# Altium PCB gecko3.PcbDoc (part 7 of 8)
Units mm, origin at the board's own origin, x right, y up, seen from the top; angles counter-clockwise.
Board outline 85.5 x 54.02 mm, 10 copper layers (Top Layer, MidLayer1, 1.2 & 2.5V Plane, GND Plane1, DDR layer 1, 3.3V Plane, DDR layer 2, GND Plane2, MidLayer2, Bottom Layer), stack 1.39 mm thick; 295 components, 567 nets, 2310 pads, 1568 vias.
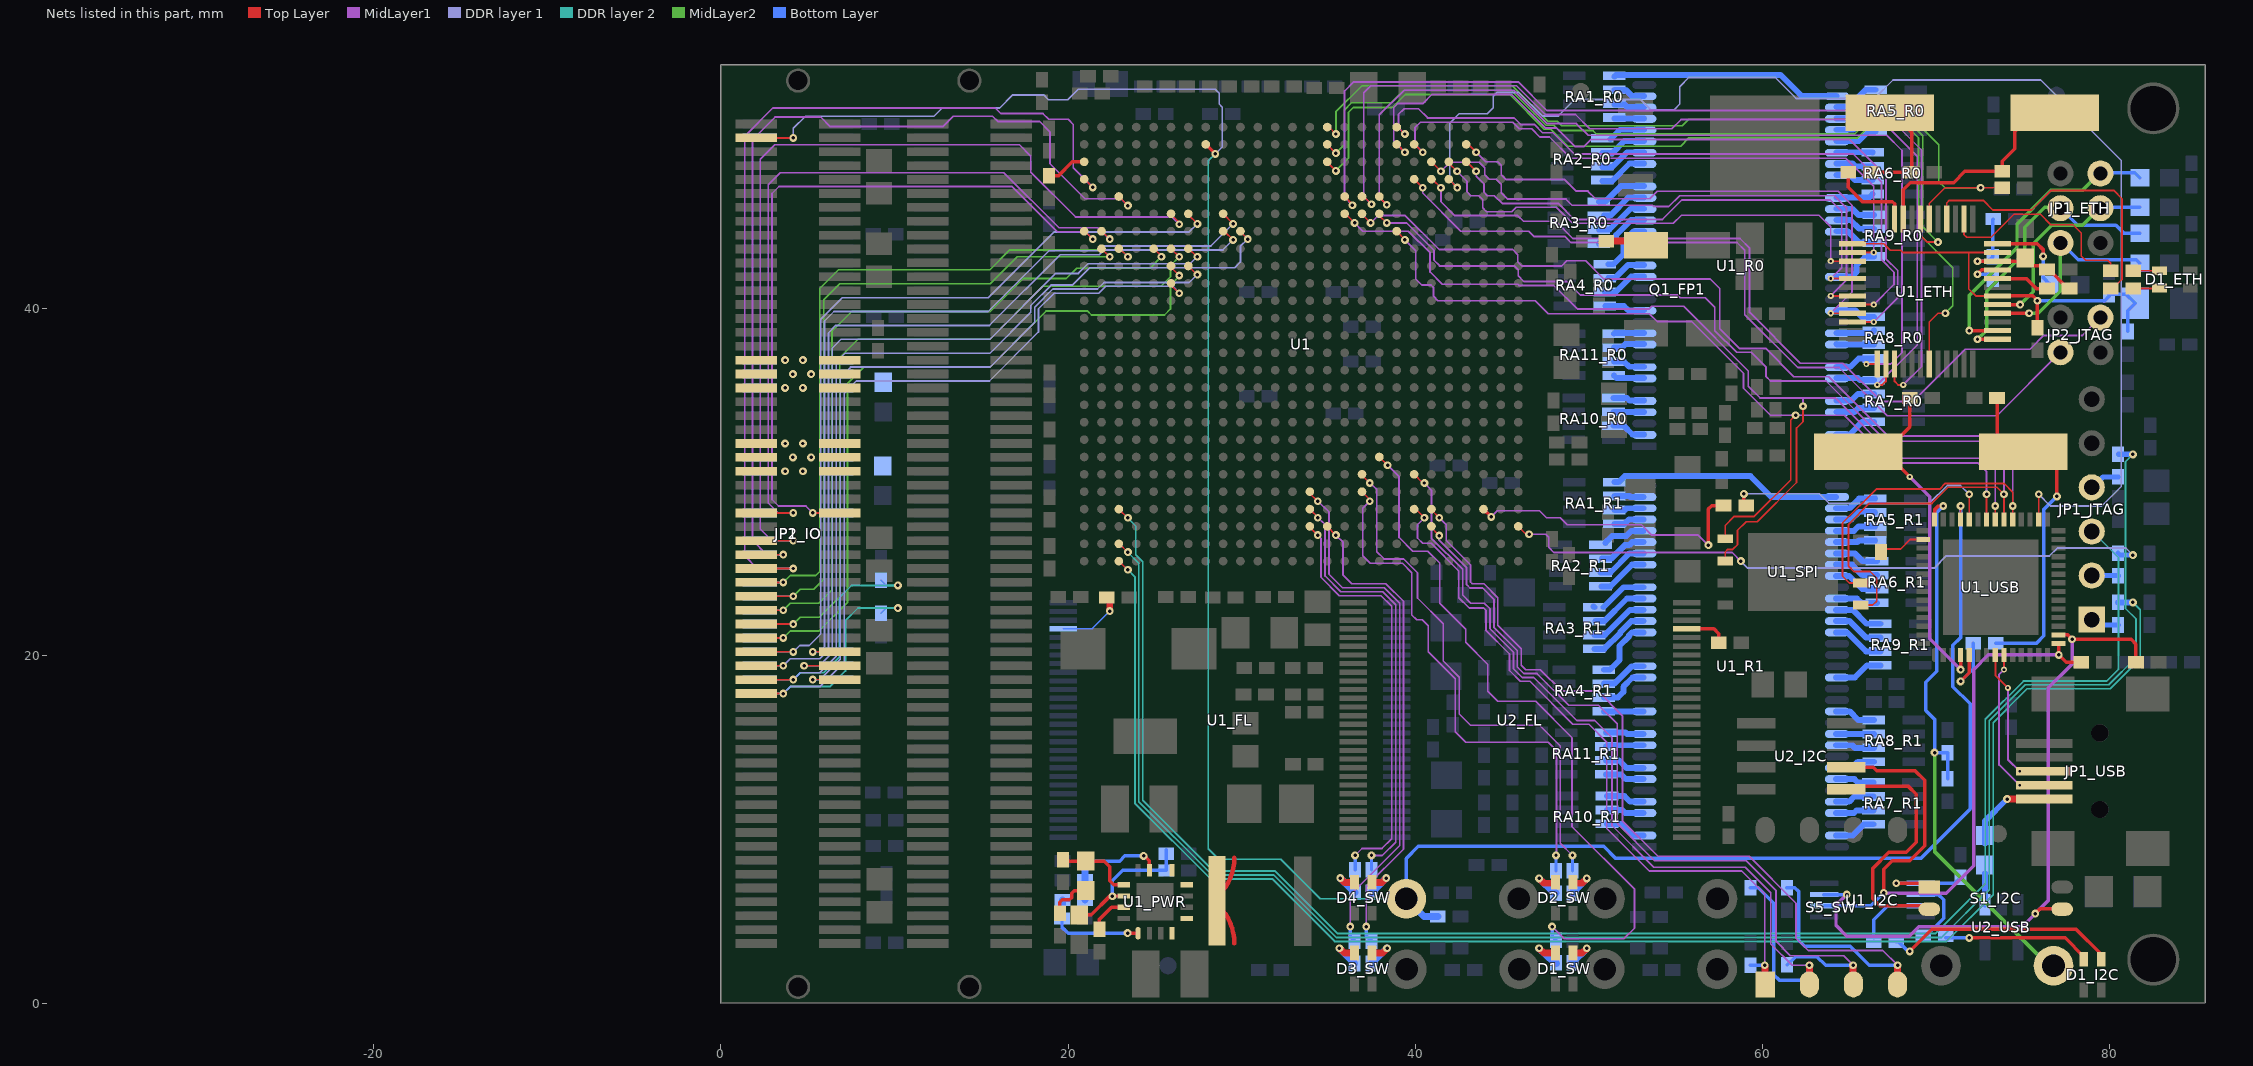
[diagram p15: the nets of this part, all layers, seen from the top]

## Via types
v1: diameter 0.45, hole 0.2, Top Layer to Bottom Layer, tented both sides, 1470 vias
v2: diameter 0.45, hole 0.2, Top Layer to Bottom Layer, tented bottom, 62 vias
v3: diameter 0.35, hole 0.15, Top Layer to MidLayer1, tented both sides, 26 vias
v4: diameter 0.45, hole 0.2, MidLayer2 to Bottom Layer, tented both sides, 10 vias

## Nets (pads, with @x,y where several pads share a name; then routed paths per layer and width w, separated by ;. In a path a pad name is that pad's centre, name@x,y a point inside that pad or via, vN(x,y) a via of type N, cw(c..) or ccw(c..) an arc to the next point about the centre after c; other vN are vias at no path point) (continued)
LED1: R2_SW.2 U1.G9 | length 41.2
  Top Layer w0.1: U1.G9@37.927,31.449 v1(38.4,30.975)
  MidLayer1 w0.1: v1(38.4,30.975) 39.062,30.312 39.062,26.812 39.85,26.025 40.72,26.025 41.4,25.345 41.4,23.03 42.9,21.53 42.9,20.775 44.175,19.5 44.175,17.95 44.75,17.375 46.925,17.375 49.025,15.275 49.025,10.155 52.625,6.555 52.625,4.325 52,3.7 48.575,3.7 v1(47.875,4.4)
  Bottom Layer w0.2: v1(47.875,4.4) 47.875,3.85 R2_SW.2@48.1,3.625
LED2: R3_SW.2 U1.F10 | length 30.8
  Top Layer w0.1: U1.F10@36.927,30.449 36.927,30.398 v1(37.375,29.95)
  MidLayer1 w0.1: v1(37.375,29.95) 37.775,29.6 37.775,26 38.2,25.575 39.325,25.575 40.125,24.775 40.125,23.325 41.6,21.85 41.6,19.7 42.527,18.773 42.527,16.648 43.175,16 47.15,16 48.35,14.8 48.35,9.2 v1(49.05,8.5)
  Bottom Layer w0.1: v1@49.05,8.475 v1(49.05,8.5)
  Bottom Layer w0.2: R3_SW.2@49.05,7.625 v1@49.05,8.475
LED3: R4_SW.2 U1.E10 | length 30.9
  Top Layer w0.1: U1.E10@36.927,29.449 37.375,29.001 v1(37.375,28.9)
  MidLayer1 w0.1: v1(37.375,28.9) 36.975,28.5 36.975,25.75 37.4,25.325 39.256,25.325 39.8,24.782 39.8,22.35 40.075,22.075 40.4,22.075 40.75,21.725 40.75,20.225 42.3,18.675 42.3,15.625 42.9,15.025 47.65,15.025 48.125,14.55 48.125,8.525 v1(48.1,8.5)
  Bottom Layer w0.2: R4_SW.2@48.1,7.625 v1(48.1,8.5)
LED4: R5_SW.2 U1.C12 | length 27.9
  Top Layer w0.1: U1.C12@34.927,27.449 v1(35.425,26.95)
  MidLayer1 w0.1: v1(35.425,26.95) 35.839,26.536 35.839,24.635 36.329,24.145 38.305,24.145 39.323,23.127 39.323,8.873 37.175,6.725 v1(37.175,4.4)
  Bottom Layer w0.2: v1(37.175,4.4) 37.175,3.875 R5_SW.2@37.475,3.575
LED5: R6_SW.2 U1.E13 | length 30.7
  Top Layer w0.1: U1.E13@33.927,29.449 33.927,29.348 v1(34.375,28.9)
  MidLayer1 w0.1: v1(34.375,28.9) 35.025,28.3 35.025,24.7 35.806,23.919 38.211,23.919 39.096,23.034 39.096,9.071 36.25,6.225 v1(36.25,4.4)
  Bottom Layer w0.2: v1(36.25,4.4) 36.25,3.825 R6_SW.2@36.5,3.575
LED6: R7_SW.2 U1.D13 | length 25.2
  Top Layer w0.1: U1.D13@33.927,28.448 v1@34.425,27.95
  MidLayer1 w0.1: v1(34.375,27.95) 34.8,27.575 34.8,24.6 35.711,23.689 38.116,23.689 38.867,22.938 38.867,9.267 38.1,8.5 v1(37.475,8.5)
  Bottom Layer w0.2: R7_SW.2@37.475,7.675 v1(37.475,8.5)
LED7: R8_SW.2 U1.C13 | length 24.7
  Top Layer w0.1: U1.C13@33.927,27.449 33.927,27.398 v1(34.375,26.95)
  MidLayer1 w0.1: v1(34.375,26.95) 34.562,26.763 34.562,24.518 35.617,23.463 38.022,23.463 38.641,22.845 38.641,9.466 38.075,8.9 36.925,8.9 v1(36.525,8.5)
  Bottom Layer w0.2: R8_SW.2@36.525,7.675 v1(36.525,8.5)
LINESENSORCLK: JP1_IO.82 JP2_IO.82 U1.V20 | length 45.5
  Top Layer w0.1: v1@5.275,18.625 v1(5.3,18.625) 6.825,18.65 JP2_IO.82@6.85,18.625 ; U1.V20@26.927,42.448 v1@27.425,41.95
  DDR layer 1 w0.1: v1(5.3,18.625) 5.7,18.625 6.877,19.802 6.877,36.027 7.475,36.625 15.5,36.625 18.075,39.2 18.075,40.075 19.122,41.122 21.697,41.122 22.075,41.5 26.975,41.5 v1@27.425,41.95
  Bottom Layer w0.1: v1(5.3,18.625) 6.625,18.65 JP1_IO.82@6.65,18.625
  other v1: 27.45,41.95
LINESENSORIN1: JP1_IO.77 JP2_IO.77 U1.AA20 | length 48.9
  Top Layer w0.1: JP2_IO.77@2.05,20.225 v1(4.175,20.225) ; U1.AA20@26.927,45.449 26.927,45.398 v1(27.45,44.875)
  DDR layer 1 w0.1: v1(4.175,20.225) 4.541,20.591 5.091,20.591 5.75,21.25 5.75,39.375 7,40.625 15.4,40.625 19.175,44.4 26.95,44.4 v1(27.45,44.875)
  Bottom Layer w0.1: JP1_IO.77@2.25,20.225 v1(4.175,20.225)
LINESENSORIN2: JP1_IO.79 JP2_IO.79 U1.Y18 | length 50.4
  Top Layer w0.1: JP2_IO.79@2.05,19.425 v1(3.6,19.425) ; U1.Y18@28.927,44.449 29.001,44.449 v1(29.5,43.95)
  DDR layer 1 w0.1: v1(3.6,19.425) 4,19.825 5.7,19.825 6.2,20.325 6.2,38.6 6.625,39.025 15.475,39.025 19.55,43.1 21.8,43.1 22.075,43.375 28.925,43.375 v1(29.5,43.95)
  Bottom Layer w0.1: JP1_IO.79@2.25,19.425 v1(3.6,19.425)
LINESENSOROUT1: JP1_IO.78 JP2_IO.78 U1.AA18 | length 49.2
  Top Layer w0.1: v1(5.3,20.225) JP2_IO.78@6.85,20.225 ; U1.AA18@28.852,45.302 28.852,45.327 U1.AA18@28.927,45.327 ; U1.AA18@28.927,45.448 v1(29.5,44.875)
  DDR layer 1 w0.1: v1(5.3,20.225) 5.675,20.225 5.975,20.525 5.975,39.282 6.518,39.825 15.4,39.825 18.9,43.325 21.7,43.325 21.975,43.6 22.275,43.6 27.55,43.6 28.225,43.6 v1(29.5,44.875)
  Bottom Layer w0.1: v1(5.3,20.225) JP1_IO.78@6.65,20.225
LINESENSOROUT2: JP1_IO.80 JP2_IO.80 U1.W20 | length 47.3
  Top Layer w0.1: v1(4.8,19.425) JP2_IO.80@6.85,19.425 JP2_IO.80@6.825,19.45 ; U1.W20@26.927,43.449 26.951,43.449 v1@27.425,42.975
  DDR layer 1 w0.1: v1(4.8,19.425) 5.675,19.425 6.425,20.175 6.425,37.725 6.925,38.225 15.5,38.225 19.296,42.021 20.596,42.021 21.15,42.575 27.025,42.575 v1@27.425,42.975
  Bottom Layer w0.1: v1(4.8,19.425) JP1_IO.80@6.65,19.425 JP1_IO.80@6.625,19.45
  other v1: 27.45,42.975
"LOW BATTERY": JP1_IO.57 JP2_IO.57 U1.Y25 | length 46.3
  Top Layer w0.1: JP2_IO.57@2.05,28.225 v1(4.175,28.225) ; U1.Y25@21.927,44.449 21.951,44.449 v1(22.4,44)
  MidLayer1 w0.1: v1(4.175,28.225) 3.3,28.225 2.725,28.8 2.725,47.125 3.425,47.825 16.3,47.825 19.475,44.65 21.705,44.65 22.355,44 v1(22.4,44)
  Bottom Layer w0.1: JP1_IO.57@2.25,28.225 v1(4.175,28.225)
MDC: U1.AE12 U1_ETH.31 | length 47.3
  Top Layer w0.1: U1.AE12@34.927,49.449 v1(35.425,48.95) ; U1_ETH.31@69.1,45.15 69.1,44.2 69.475,43.825 v1(70.1,43.825)
  MidLayer2 w0.1: v1(35.425,48.95) 35.9,49.425 35.9,51.425 36.325,51.85 38.6,51.85 39.325,52.575 45.505,52.575 47.527,50.553 47.972,50.553 48.275,50.25 50.225,50.25 50.425,50.05 65.3,50.05 65.875,50.625 68.55,50.625 69.225,49.95 69.225,44.7 v1(70.1,43.825)
MDIO: R15_ETH.2 U1.AF12 U1_ETH.30 | length 49.1
  Top Layer w0.1: U1.AF12@34.927,50.449 35.026,50.449 v1(35.425,50.05) ; U1_ETH.30@69.6,45.15 69.6,46.05 70.5,46.95 R15_ETH.2@73.8,46.95
  MidLayer2 w0.1: v1(35.425,50.05) 35.425,51.325 36.925,52.825 45.58,52.825 47.627,50.778 48.172,50.778 48.425,50.525 55.375,50.525 55.75,50.9 68.675,50.9 70.15,49.425 70.15,47.3 70.5,46.95 v1(72.55,46.95)
MISO: U1.AA11 U1_SPI.2 U1_USB.35 | length 59.6
  Top Layer w0.1: U1.AA11@35.927,45.449 35.976,45.449 v1(36.5,44.925) ; U1_SPI.2@57.85,25.46 57.85,25.975 58,26.125 58.275,26.125 58.55,26.4 58.55,27.225 59.05,27.725 59.7,27.725 61.95,29.975 61.95,33.112 62.325,33.487 v1(62.325,34.375) ; U1_USB.35@73.4,27.85 v1(73.4,28.625)
  MidLayer1 w0.1: v1(36.5,44.925) 36.975,44.45 39.6,44.45 40.85,43.2 40.85,42.1 41.55,41.4 45.9,41.4 45.975,41.325 47.975,41.325 49.325,39.975 53.475,39.975 53.625,40.125 55.45,40.125 59.175,36.4 59.175,35.525 59.85,34.85 64.175,34.85 67.65,31.375 72.825,31.375 73.4,30.8 v1(73.4,28.625) ; v1(62.325,34.375) 62.325,34.85
MOSI: U1.AA9 U1_SPI.5 U1_USB.34 | length 63.5
  Top Layer w0.1: U1.AA9@37.927,45.449 37.927,45.348 v1(38.35,44.925) ; U1_SPI.5@65.65,22.92 66.345,22.92 66.575,23.15 66.575,24.475 66.2,24.85 65.25,24.85 64.95,25.15 64.95,27.575 66.15,28.775 69.75,28.775 70.675,29.7 73.5,29.7 v1(73.9,29.3) U1_USB.34@73.9,27.85
  MidLayer1 w0.1: v1(38.35,44.925) 39.5,44.925 41.075,43.35 41.075,42.775 41.397,42.453 45.697,42.453 45.925,42.225 45.925,41.875 46.247,41.553 48.722,41.553 49.5,40.775 55.1,40.775 55.25,40.625 56.7,40.625 57.25,40.075 57.25,38.725 58.5,37.475 59.35,37.475 60.2,36.625 60.2,36.075 60.45,35.825 63.65,35.825 67.125,32.35 72.625,32.35 73.9,31.075 v1(73.9,29.3)
NetC1_PWR_2: C1_PWR.2 R1_PWR.1 U1_PWR.1 | length 6.1
  Top Layer w0.2: v1(23.425,4.025) 24.025,4.025 U1_PWR.1@24.031,4.019
  Bottom Layer w0.2: C1_PWR.2@19.65,4.875 19.65,4.375 20,4.025 v1(23.425,4.025)
  Bottom Layer w0.4: C1_PWR.2@19.675,4.9 R1_PWR.1@19.675,5.925
NetC2_PWR_2: C2_PWR.2 R3_PWR.1 U1_PWR.13 | length 4.6
  Top Layer w0.2: C2_PWR.2@19.7,8.25 19.775,8.175 22.075,8.175 22.397,7.853 22.397,7.053 22.636,6.814 U1_PWR.13@23.211,6.814
NetC2_USB_2: C2_USB.2 Q1_USB.1 R4_USB.2 | length 20.4
  Top Layer w0.2: C2_USB.2@73.5,34.85 73.5,32.25 74,31.75 76.65,31.75 76.95,31.45 v1(76.95,29.175) ; Q1_USB.1@76.225,31.75 Q1_USB.1@76.525,31.45
  Bottom Layer w0.2: R4_USB.2@73.425,20.725 75.775,20.725 76.2,21.15 76.2,28.425 v1(76.95,29.175)
NetC3_PWR_2: C3_PWR.2 R3_PWR.2 | length 2.6
  Top Layer w0.2: C3_PWR.2@19.525,5.175 19.525,5.8 19.675,5.95 20.075,5.95 20.2,6.075 20.2,6.325 20.35,6.475 R3_PWR.2@21.025,6.475
NetC3_USB_2: C3_USB.2 Q1_USB.2 U1_USB.4 | length 20.2
  Top Layer w0.2: Q1_USB.2@65.65,31.75 Q1_USB.2@67.025,31.75 ; v3(68.475,30.3) 67.1,31.675 67.1,31.8 68.475,33.175 C3_USB.2@68.475,34.85 ; v1(71.4,19.2) U1_USB.4@71.4,20.05
  MidLayer1 w0.2: v3(68.475,30.3) 69.625,29.15 69.625,20.975 v1(71.4,19.2)
NetC4_ETH_2: C4_ETH.2 C5_ETH.2 L1_ETH.2 R4_ETH.2 R5_ETH.2 U1_ETH.22 | length 9.3
  Top Layer w0.2: v1@72.325,42.725 74.95,42.725 L1_ETH.2@75.125,42.9 75.55,42.475 76.15,42.475 C4_ETH.2@76.375,42.25 76.475,42.25 77.575,41.15 R5_ETH.2@77.675,41.15
  Bottom Layer w0.2: v1(72.375,42.725) 73,42.725 R4_ETH.2@73.25,42.975 73.25,45.125 C5_ETH.2@73.275,45.15
NetC4_USB_2: C4_USB.2 R5_USB.1 S1_USB.2 U1_USB.42 | length 33.6
  Top Layer w0.2: U1_USB.42@69.9,27.85 69.9,28.4 70.125,28.625 v1(70.4,28.625)
  MidLayer2 w0.2: v1(69.9,14.425) 69.9,8.725 S1_USB.2@76.75,1.875
  Bottom Layer w0.2: v1(70.4,28.625) 70.025,28.25 70.025,19.1 69.4,18.475 69.4,16.85 69.9,16.35 v1(69.9,14.425) C4_USB.2@70.65,14.425 R5_USB.1@70.65,12.925
NetC6_ETH_2: C6_ETH.2 C7_ETH.2 C8_ETH.2 C13_ETH.2 U1_ETH.18 U1_ETH.23 U1_ETH.37 | length 24.3
  Top Layer w0.1: U1_ETH.37@65.175,43.725 66.975,43.725 67.35,43.35 67.95,43.35 68.075,43.225 U1_ETH.23@73.525,43.225 ; 71.875,43.225 71.875,41.125 72.275,40.725 U1_ETH.18@73.525,40.725
  Top Layer w0.2: U1_ETH.18@73.525,40.725 75.55,40.725 v1(75.825,40.45) C8_ETH.2@75.825,38.9
  Bottom Layer w0.2: v1(75.825,40.45) 79.7,40.45 79.95,40.7 79.95,40.825 80.925,40.825 C13_ETH.2@81.45,40.3 81.025,39.875 C7_ETH.2@81.025,38.675
NetC6_PWR_2: C6_PWR.2 R4_PWR.2 R5_PWR.2 U1_PWR.14 | length 8.4
  Top Layer w0.2: R4_PWR.2@20.65,5.075 21.325,5.075 22.414,6.164 U1_PWR.14@23.211,6.164
  Bottom Layer w0.2: v1(22.55,6.15) 22.55,7.05 23.15,7.65 25.65,7.65 R5_PWR.2@25.65,8.825
NetC9_ETH_2: C9_ETH.2 Q1_ETH.1 U1_ETH.33 | length 13.3
  Top Layer w0.2: U1_ETH.33@68.1,45.15 68.1,46.85 68.5,47.25 71,47.25 71.65,47.9 C9_ETH.2@73.8,47.9 ; C9_ETH.2@73.8,47.85 73.8,48.475 74.525,49.2 74.525,50.175 75.35,51 Q1_ETH.1@76.975,51
NetC10_ETH_2: C10_ETH.2 Q1_ETH.2 R1_ETH.1 | length 6.1
  Top Layer w0.2: R1_ETH.1@66.225,47.85 C10_ETH.2@68.575,47.85 68.575,50.15 67.725,51 Q1_ETH.2@67.475,51
NetC22_PWR_1: C22_PWR.1 R1_PWR.2 R8_PWR.2 U1_PWR.11 | length 6.7
  Top Layer w0.2: v1(24.35,8.475) 24.4,8.475 24.681,8.194 U1_PWR.11@24.681,7.659
  Bottom Layer w0.2: R8_PWR.2@20.975,8.175 22.975,8.175 23.275,8.475 v1(24.35,8.475)
  Bottom Layer w0.4: R1_PWR.2@20.975,5.925 C22_PWR.1@20.975,7.075 R8_PWR.2@20.975,8.175
NetD1_ETH_2: D1_ETH.2 R11_ETH.1 | length 1.5
  Top Layer w0.1: R11_ETH.1@81.35,42.175 D1_ETH.2@82.85,42.175
NetD1_ETH_4: D1_ETH.4 R10_ETH.1 | length 1.5
  Top Layer w0.1: R10_ETH.1@81.542,41.159 R10_ETH.1@81.551,41.15
  Top Layer w0.101: R10_ETH.1@81.35,41.15 82.825,41.15 D1_ETH.4@82.85,41.175
NetD1_I2C_1: D1_I2C.1 R2_I2C.1 | length 8.5
  Top Layer w0.2: v1(71.9,3.75) 77.425,3.75 78.5,2.675 D1_I2C.1@78.5,2.525
  Bottom Layer w0.2: R2_I2C.1@70.55,3.75 v1(71.9,3.75)
NetD1_I2C_3: D1_I2C.3 R1_I2C.1 | length 13.4
  Top Layer w0.2: v1(68.475,2.975) 69.75,4.25 78.05,4.25 79.5,2.8 D1_I2C.3@79.5,2.525
  Bottom Layer w0.2: R1_I2C.1@67.7,3.525 67.825,3.525 68.375,2.975 v1(68.475,2.975)
NetD1_SW_1: D1_SW.1 R2_SW.1 | length 2.4
  Top Layer w0.4: v1(47.125,3.15) 47.4,2.875 D1_SW.1@48.075,2.875
  Bottom Layer w0.4: v1(47.125,3.15) 47.975,2.325 R2_SW.1@48.1,2.325 ; R2_SW.1@48.075,2.275 R2_SW.1@48.125,2.275
NetD1_SW_3: D1_SW.3 R1_SW.1 | length 2.2
  Top Layer w0.4: D1_SW.3@49.075,2.875 49.6,2.875 v1(49.875,3.15)
  Bottom Layer w0.4: R1_SW.1@49,2.275 R1_SW.1@49.025,2.275 ; R1_SW.1@49.05,2.325 v1(49.875,3.15) ; R1_SW.1@49.125,2.275 R1_SW.1@49.175,2.275
NetD2_SW_1: D2_SW.1 R4_SW.1 | length 2.4
  Top Layer w0.4: v1(47.125,7.175) 47.4,6.9 D2_SW.1@48.075,6.9
  Bottom Layer w0.4: v1(47.125,7.175) 47.975,6.325 R4_SW.1@48.1,6.325
NetD2_SW_3: D2_SW.3 R3_SW.1 | length 2.1
  Top Layer w0.4: D2_SW.3@49.075,6.9 49.6,6.9 v1(49.875,7.175)
  Bottom Layer w0.4: R3_SW.1@49.05,6.325 49.05,6.35 v1(49.875,7.175)
NetD3_SW_1: D3_SW.1 R6_SW.1 | length 2.2
  Top Layer w0.4: v1(35.625,3.15) 35.925,2.875 D3_SW.1@36.5,2.875
  Bottom Layer w0.4: v1(35.625,3.15) 35.7,3.075 R6_SW.1@36.5,2.275
NetD3_SW_3: D3_SW.3 R5_SW.1 | length 2.3
  Top Layer w0.4: D3_SW.3@37.5,2.875 38.1,2.875 v1(38.375,3.15)
  Bottom Layer w0.4: R5_SW.1@37.475,2.275 38.375,3.175 v1(38.375,3.15)
NetD4_SW_1: D4_SW.1 R8_SW.1 | length 2.1
  Top Layer w0.4: v1(35.675,7.2) 35.925,6.95 D4_SW.1@36.5,6.95
  Bottom Layer w0.4: v1(35.675,7.2) 36.5,6.375 R8_SW.1@36.525,6.375
NetD4_SW_3: D4_SW.3 R7_SW.1 | length 2.1
  Top Layer w0.4: D4_SW.3@37.5,6.95 38.075,6.95 v1(38.325,7.2)
  Bottom Layer w0.4: R7_SW.1@37.475,6.375 37.5,6.375 v1(38.325,7.2)
NetFB1_IO_2: FB1_IO.2 JP1_IO.35 JP1_IO.36 JP1_IO.37 JP1_IO.38 JP1_IO.39 JP1_IO.40 JP2_IO.35 JP2_IO.36 JP2_IO.37 JP2_IO.38 JP2_IO.39 JP2_IO.40
  other v1: 3.7,35.425 4.725,35.425 4.15,36.225 5.2,36.225 3.7,37.025 4.725,37.025
NetFB1_USB_1: FB1_USB.1 JP1_USB.Vbus | length 5.3
  Top Layer w0.4: v1(74.075,11.75) JP1_USB.Vbus@76.225,11.75
  Bottom Layer w0.34: FB1_USB.1@72.8,9.175 72.8,10.475 v1(74.075,11.75)
NetFB1_USB_2: FB1_USB.2 U2_USB.1 | length 1.8
  Bottom Layer w0.34: FB1_USB.2@72.8,7.475 72.8,5.663 U2_USB.1@72.804,5.659
NetFB2_IO_2: FB2_IO.2 JP1_IO.47 JP1_IO.48 JP1_IO.49 JP1_IO.50 JP1_IO.51 JP1_IO.52 JP2_IO.47 JP2_IO.48 JP2_IO.49 JP2_IO.50 JP2_IO.51 JP2_IO.52
  other v1: 3.7,30.625 4.725,30.625 4.15,31.425 5.2,31.425 3.7,32.225 4.725,32.225
NetJP1_JTAG_1: JP1_JTAG.1 R2_JTAG.2 | length 1.6
  Bottom Layer w0.3: JP1_JTAG.1@79,22.075 79.3,21.775 R2_JTAG.2@80.5,21.775
NetJP1_JTAG_2: JP1_JTAG.2 R3_JTAG.2 | length 1.6
  Bottom Layer w0.3: JP1_JTAG.2@78.955,24.615 80.485,24.615 R3_JTAG.2@80.5,24.6
NetJP1_JTAG_4: JP1_JTAG.4 R1_JTAG.2 | length 1.8
  Bottom Layer w0.3: JP1_JTAG.4@79,29.695 79.605,30.3 R1_JTAG.2@80.5,30.3
NetJP1_USB_D+: JP1_USB.D+ U1_USB.8 | length 7.3
  Top Layer w0.12: U1_USB.8@73.4,20.05 73.4,18.875 v3(74.125,18.15)
  MidLayer1 w0.12: v3(74.125,18.15) 74.125,14.025 v3(74.8,13.35)
NetJP1_USB_D-: JP1_USB.D- U1_USB.9 | length 8.1
  Top Layer w0.12: v3(73.9,19.2) 73.9,19.25 U1_USB.9@73.9,20.05
  MidLayer1 w0.12: v3(73.9,19.2) 73.625,18.925 73.625,13.725 v3(74.8,12.55)
NetL1_PWR_1: L1_PWR.1 U1_PWR.4 U1_PWR.5 U1_PWR.8 U1_PWR.9
NetQ1_FP1_3: Q1_FP1.3 R2_FP1.2 | length 2.4
  Top Layer w0.4: R2_FP1.2@51,43.875 52.425,43.875 52.575,43.725 53.217,43.725 Q1_FP1.3@53.292,43.65
NetR1_ETH_2: R1_ETH.2 U1_ETH.34 | length 4.9
  Top Layer w0.2: R1_ETH.2@64.925,47.9 64.925,46.975 65.75,46.15 67.475,46.15 67.6,46.025 U1_ETH.34@67.6,45.15
NetR1_I2C_2: R1_I2C.2 U1_I2C.3 | length 4.1
  Bottom Layer w0.2: R1_I2C.2@66.4,3.75 66.4,4.8 67.2,5.6 U1_I2C.3@69.075,5.6
NetR2_ETH_2: R2_ETH.2 U1_ETH.24 | length 5
  Top Layer w0.2: U1_ETH.24@73.525,43.725 75.825,43.725 76.15,43.4 v1(76.15,43)
  Bottom Layer w0.2: v1(76.15,43) 76.15,41.8 R2_ETH.2@76.575,41.375
NetR2_I2C_2: R2_I2C.2 U1_I2C.2 | length 4.2
  Bottom Layer w0.2: U1_I2C.2@69.1,6.25 70.125,6.25 70.425,5.95 70.425,4.875 69.3,3.75 R2_I2C.2@69.25,3.75
NetR2_PWR_1: R2_PWR.1 U1_PWR.15 | length 2.3
  Top Layer w0.2: R2_PWR.1@21.8,4.25 21.8,4.814 22.5,5.514 U1_PWR.15@23.211,5.514
NetR3_CNF_2: R3_CNF.2 U1.AD26 | length 2.8
  Top Layer w0.2: R3_CNF.2@18.65,47.65 R3_CNF.2@18.975,47.975 ; R3_CNF.2@18.9,47.65 19.45,47.65 20.249,48.449 U1.AD26@20.927,48.449
NetR3_FL_1: R3_FL.1 U1_FL.53 | length 3.9
  Top Layer w0.4: R3_FL.1@22.225,23.35 22.4,23.175 v1(22.4,22.575)
  Bottom Layer w0.1: U1_FL.53@19.725,21.55 21.375,21.55 v1(22.4,22.575)
NetR3_I2C_1: R3_I2C.1 S1_I2C.1 U1_I2C.1 | length 7.7
  Top Layer w0.2: v1(67.7,6.9) 69.375,6.9 S1_I2C.1@69.6,6.675
  Bottom Layer w0.2: v1(67.7,6.9) U1_I2C.1@69.1,6.9 68.151,6.9 71.05,6.9 R3_I2C.1@71.4,7.25
NetR4_CNF_2: R4_CNF.2 U1.D3 | length 17.1
  Top Layer w0.2: U1.D3@43.927,28.448 v1(44.375,28) ; v1(56.875,26.375) 56.875,28.45 57.075,28.65 R4_CNF.2@57.75,28.65
  MidLayer1 w0.1: v1(44.375,28) 44.725,28.35 47.15,28.35 47.55,27.95 48.35,27.95 48.75,27.55 53.025,27.55 53.625,26.95 56.3,26.95 v1(56.875,26.375)
NetR4_ETH_1: R4_ETH.1 U1_ETH.21 | length 2.2
  Top Layer w0.2: v1(72.375,41.975) 72.625,42.225 U1_ETH.21@73.525,42.225
  Bottom Layer w0.2: v1(72.375,41.975) 73.125,41.975 R4_ETH.1@73.25,41.85
NetR4_FL_1: R4_FL.1 U2_FL.53 | length 2.5
  Top Layer w0.2: U2_FL.53@55.625,21.55 57.2,21.55 57.475,21.275 R4_FL.1@57.475,20.75
NetR4_USB_1: R4_USB.1 U1_USB.5 | length 4.2
  Top Layer w0.2: v1(71.4,18.525) 71.9,19.025 U1_USB.5@71.9,20.05
  Bottom Layer w0.2: v1(71.4,18.525) 72.125,19.25 R4_USB.1@72.125,20.725
NetR5_ETH_1: R5_ETH.1 U1_ETH.20 | length 3.1
  Top Layer w0.2: U1_ETH.20@73.525,41.725 75.175,41.725 75.75,41.15 R5_ETH.1@76.375,41.15
NetR6_USB_1: R6_USB.1 U1_USB.44 | length 2.7
  Top Layer w0.1: R6_USB.1@66.825,25.975 67,26.15 67.95,26.15 68.5,26.7 U1_USB.44@69.25,26.7
NetR10_ETH_2: R10_ETH.2 U1_ETH.28 | length 17.5
  Top Layer w0.1: U1_ETH.28@70.6,45.15 70.6,46.075 70.75,46.225 72.7,46.225 73.25,45.675 75.5,45.675 76.625,46.8 80.225,46.8 80.7,46.325 80.7,41.675 80.175,41.15 R10_ETH.2@80.05,41.15
NetR11_ETH_2: R11_ETH.2 U1_ETH.26 | length 12.3
  Top Layer w0.1: U1_ETH.26@71.6,45.15 71.6,44.25 71.75,44.1 73.15,44.1 74.475,45.425 76,45.425 76.6,44.825 77.875,44.825 78.35,44.35 78.35,43.025 78.6,42.775 79.875,42.775 80.05,42.6 R11_ETH.2@80.05,42.175
NetRA1_R0_5: RA1_R0.5 U1_R0.35 | length 13.3
  Bottom Layer w0.34: RA1_R0.5@51.461,53.346 51.561,53.446 61.036,53.446 62.236,52.246 U1_R0.35@64.261,52.246
NetRA1_R0_6: RA1_R0.6 U1_R0.32 | length 2.4
  Bottom Layer w0.34: RA1_R0.6@51.461,52.546 RA1_R0.6@52.036,52.546 ; RA1_R0.6@51.461,52.596 52.111,52.596 52.461,52.246 U1_R0.32@53.161,52.246
NetRA1_R0_7: RA1_R0.7 U1_R0.31 | length 1.8
  Bottom Layer w0.34: RA1_R0.7@51.461,51.746 52.054,51.746 52.204,51.596 U1_R0.31@53.161,51.596
NetRA1_R0_8: RA1_R0.8 U1_R0.30 | length 1.7
  Bottom Layer w0.34: RA1_R0.8@51.461,50.946 U1_R0.30@53.161,50.946
NetRA1_R1_5: RA1_R1.5 U1_R1.35 | length 13.4
  Bottom Layer w0.34: RA1_R1.5@51.461,29.996 51.711,29.996 52.061,30.346 59.304,30.346 60.504,29.146 U1_R1.35@64.236,29.146
NetRA1_R1_6: RA1_R1.6 U1_R1.32 | length 1.7
  Bottom Layer w0.34: RA1_R1.6@51.461,29.196 52.336,29.196 52.386,29.146 U1_R1.32@53.136,29.146
NetRA1_R1_7: RA1_R1.7 U1_R1.31 | length 1.7
  Bottom Layer w0.34: RA1_R1.7@51.461,28.396 52.066,28.396 52.166,28.496 U1_R1.31@53.136,28.496
NetRA1_R1_8: RA1_R1.8 U1_R1.30 | length 1.8
  Bottom Layer w0.34: RA1_R1.8@51.461,27.596 52.048,27.596 52.299,27.846 U1_R1.30@53.136,27.846
NetRA2_R0_5: RA2_R0.5 U1_R0.29 | length 2.2
  Bottom Layer w0.34: RA2_R0.5@51.236,49.746 51.786,50.296 U1_R0.29@53.161,50.296
NetRA2_R0_6: RA2_R0.6 U1_R0.28 | length 2.7
  Bottom Layer w0.34: RA2_R0.6@50.761,48.946 51.336,48.946 52.036,49.646 U1_R0.28@53.161,49.646
NetRA2_R0_7: RA2_R0.7 U1_R0.27 | length 2.8
  Bottom Layer w0.34: RA2_R0.7@50.761,48.146 51.336,48.146 52.186,48.996 U1_R0.27@53.161,48.996
NetRA2_R0_8: RA2_R0.8 U1_R0.26 | length 2.8
  Bottom Layer w0.34: RA2_R0.8@50.761,47.346 51.336,47.346 52.336,48.346 U1_R0.26@53.161,48.346
NetRA2_R1_5: RA2_R1.5 U1_R1.29 | length 2.5
  Bottom Layer w0.34: RA2_R1.5@50.943,26.503 51.336,26.896 52.144,26.896 52.444,27.196 U1_R1.29@53.136,27.196
NetRA2_R1_6: RA2_R1.6 U1_R1.28 | length 2.8
  Bottom Layer w0.34: RA2_R1.6@50.738,25.596 51.286,25.596 52.061,26.371 52.312,26.371 52.487,26.546 U1_R1.28@53.136,26.546
NetRA2_R1_7: RA2_R1.7 U1_R1.27 | length 2.9
  Bottom Layer w0.34: RA2_R1.7@50.661,24.796 51.236,24.796 52.336,25.896 U1_R1.27@53.136,25.896
NetRA2_R1_8: RA2_R1.8 U1_R1.26 | length 2.9
  Bottom Layer w0.34: RA2_R1.8@50.711,23.996 51.236,23.996 52.475,25.235 52.475,25.246 U1_R1.26@53.136,25.246
NetRA3_R0_5: RA3_R0.5 U1_R0.24 | length 2.9
  Bottom Layer w0.34: RA3_R0.5@50.586,46.146 50.936,46.146 51.836,47.046 U1_R0.24@53.161,47.046
NetRA3_R0_6: RA3_R0.6 U1_R0.23 | length 2.7
  Bottom Layer w0.34: RA3_R0.6@50.861,45.346 51.217,45.346 52.267,46.396 U1_R0.23@53.161,46.396
NetRA3_R0_7: RA3_R0.7 U1_R0.22 | length 3.1
  Bottom Layer w0.34: RA3_R0.7@50.561,44.546 51.186,44.546 52.386,45.746 U1_R0.22@53.161,45.746
NetRA3_R0_8: RA3_R0.8 U1_R0.21 | length 3.2
  Bottom Layer w0.34: RA3_R0.8@50.561,43.746 51.186,43.746 51.561,44.121 51.561,44.228 52.429,45.096 U1_R0.21@53.161,45.096
NetRA3_R1_5: RA3_R1.5 U1_R1.24 | length 2.8
  Bottom Layer w0.34: RA3_R1.5@50.261,22.846 RA3_R1.5@50.311,22.796 ; RA3_R1.5@50.836,22.796 51.986,23.946 U1_R1.24@53.136,23.946
NetRA3_R1_6: RA3_R1.6 U1_R1.23 | length 3.3
  Bottom Layer w0.34: RA3_R1.6@50.386,21.996 50.886,21.996 52.186,23.296 U1_R1.23@53.136,23.296
NetRA3_R1_7: RA3_R1.7 U1_R1.22 | length 3.4
  Bottom Layer w0.34: RA3_R1.7@50.311,21.196 50.911,21.196 52.361,22.646 U1_R1.22@53.136,22.646
NetRA3_R1_8: RA3_R1.8 U1_R1.21 | length 3.5
  Bottom Layer w0.34: RA3_R1.8@50.311,20.396 50.886,20.396 51.823,21.333 51.823,21.383 52.436,21.996 U1_R1.21@53.136,21.996
NetRA4_R0_5: RA4_R0.5 U1_R0.20 | length 3.3
  Bottom Layer w0.34: RA4_R0.5@51.111,42.546 51.411,42.546 51.977,43.112 51.977,43.862 52.561,44.446 U1_R0.20@53.161,44.446
NetRA4_R0_6: RA4_R0.6 U1_R0.17 | length 2.4
  Bottom Layer w0.34: RA4_R0.6@51.111,41.746 51.486,41.746 52.236,42.496 U1_R0.17@53.161,42.496
NetRA4_R0_7: RA4_R0.7 U1_R0.16 | length 2.6
  Bottom Layer w0.34: RA4_R0.7@50.911,40.946 51.536,40.946 52.436,41.846 U1_R0.16@53.161,41.846
NetRA4_R0_8: RA4_R0.8 U1_R0.13 | length 2.3
  Bottom Layer w0.34: RA4_R0.8@50.936,40.146 52.011,40.146 52.261,39.896 U1_R0.13@53.161,39.896
NetRA4_R1_5: RA4_R1.5 U1_R1.20 | length 3.7
  Bottom Layer w0.34: RA4_R1.5@50.861,19.196 51.211,19.196 51.761,19.746 51.761,20.571 52.313,21.123 52.313,21.18 52.479,21.346 U1_R1.20@53.136,21.346
NetRA4_R1_6: RA4_R1.6 U1_R1.17 | length 2.7
  Bottom Layer w0.34: RA4_R1.6@50.861,18.396 51.461,18.396 52.461,19.396 U1_R1.17@53.136,19.396
NetRA4_R1_7: RA4_R1.7 U1_R1.16 | length 2.9
  Bottom Layer w0.34: RA4_R1.7@50.861,17.596 51.661,17.596 51.977,17.912 51.977,18.212 52.511,18.746 U1_R1.16@53.136,18.746
NetRA4_R1_8: RA4_R1.8 U1_R1.13 | length 2.3
  Bottom Layer w0.34: RA4_R1.8@50.861,16.796 51.986,16.796 U1_R1.13@53.136,16.796
NetRA5_R0_1: RA5_R0.1 U1_R0.39 | length 2.5
  Bottom Layer w0.34: U1_R0.39@64.261,49.646 65.535,49.646 66.085,50.196 RA5_R0.1@66.511,50.196
NetRA5_R0_2: RA5_R0.2 U1_R0.38 | length 2.5
  Bottom Layer w0.34: U1_R0.38@64.261,50.296 65.236,50.296 65.936,50.996 RA5_R0.2@66.511,50.996
NetRA5_R0_3: RA5_R0.3 U1_R0.37 | length 2.6
  Bottom Layer w0.34: U1_R0.37@64.261,50.946 65.105,50.946 65.955,51.796 RA5_R0.3@66.511,51.796
NetRA5_R0_4: RA5_R0.4 U1_R0.36 | length 2.7
  Bottom Layer w0.34: U1_R0.36@64.261,51.596 64.936,51.596 65.936,52.596 RA5_R0.4@66.511,52.596
NetRA5_R1_1: RA5_R1.1 U1_R1.39 | length 2.3
  Bottom Layer w0.34: U1_R1.39@64.236,26.546 65.461,26.546 65.561,26.646 RA5_R1.1@66.486,26.646
NetRA5_R1_2: RA5_R1.2 U1_R1.38 | length 2.4
  Bottom Layer w0.34: U1_R1.38@64.236,27.196 65.261,27.196 65.511,27.446 RA5_R1.2@66.486,27.446
NetRA5_R1_3: RA5_R1.3 U1_R1.37 | length 2.5
  Bottom Layer w0.34: U1_R1.37@64.236,27.846 65.111,27.846 65.561,28.296 66.436,28.296 RA5_R1.3@66.486,28.246
NetRA5_R1_4: RA5_R1.4 U1_R1.36 | length 2.5
  Bottom Layer w0.34: U1_R1.36@64.236,28.496 65.011,28.496 65.561,29.046 RA5_R1.4@66.486,29.046
NetRA6_R0_1: RA6_R0.1 U1_R0.44 | length 2.2
  Bottom Layer w0.34: U1_R0.44@64.261,46.396 66.139,46.396 RA6_R0.1@66.334,46.591
NetRA6_R0_2: RA6_R0.2 U1_R0.42 | length 2.2
  Bottom Layer w0.34: U1_R0.42@64.261,47.696 65.011,47.696 65.316,47.391 RA6_R0.2@66.334,47.391
NetRA6_R0_3: RA6_R0.3 U1_R0.41 | length 2.1
  Bottom Layer w0.34: U1_R0.41@64.261,48.346 65.186,48.346 65.341,48.191 RA6_R0.3@66.334,48.191
NetRA6_R0_4: RA6_R0.4 U1_R0.40 | length 2.1
  Bottom Layer w0.34: U1_R0.40@64.261,48.996 66.33,48.996 RA6_R0.4@66.334,48.991
NetRA6_R1_1: RA6_R1.1 U1_R1.44 | length 2.5
  Bottom Layer w0.34: U1_R1.44@64.236,23.296 65.436,23.296 65.686,23.046 RA6_R1.1@66.586,23.046
NetRA6_R1_2: RA6_R1.2 U1_R1.42 | length 2.7
  Bottom Layer w0.34: U1_R1.42@64.236,24.596 64.986,24.596 65.736,23.846 RA6_R1.2@66.586,23.846
NetRA6_R1_3: RA6_R1.3 U1_R1.41 | length 2.6
  Bottom Layer w0.34: U1_R1.41@64.236,25.246 65.141,25.246 65.741,24.646 RA6_R1.3@66.586,24.646
NetRA6_R1_4: RA6_R1.4 U1_R1.40 | length 2.5
  Bottom Layer w0.34: U1_R1.40@64.236,25.896 65.311,25.896 65.761,25.446 RA6_R1.4@66.586,25.446
NetRA7_R0_1: RA7_R0.1 U1_R0.65 | length 2.5
  Bottom Layer w0.34: U1_R0.65@64.261,32.746 65.011,32.746 65.736,33.471 RA7_R0.1@66.411,33.471
NetRA7_R0_2: RA7_R0.2 U1_R0.63 | length 2.2
  Bottom Layer w0.34: U1_R0.63@64.261,34.046 65.286,34.046 65.511,34.271 RA7_R0.2@66.411,34.271
NetRA7_R0_3: RA7_R0.3 U1_R0.62 | length 2.3
  Bottom Layer w0.34: U1_R0.62@64.261,34.696 65.111,34.696 65.486,35.071 RA7_R0.3@66.411,35.071
NetRA7_R0_4: RA7_R0.4 U1_R0.60 | length 2.2
  Bottom Layer w0.34: U1_R0.60@64.261,35.996 65.486,35.996 65.611,35.871 RA7_R0.4@66.411,35.871
NetRA7_R1_1: RA7_R1.1 U1_R1.65 | length 2.4
  Bottom Layer w0.34: U1_R1.65@64.236,9.646 65.186,9.646 65.836,10.296 RA7_R1.1@66.386,10.296
NetRA7_R1_2: RA7_R1.2 U1_R1.63 | length 2.2
  Bottom Layer w0.34: U1_R1.63@64.236,10.946 65.261,10.946 65.411,11.096 RA7_R1.2@66.386,11.096
NetRA7_R1_3: RA7_R1.3 U1_R1.62 | length 2.3
  Bottom Layer w0.34: U1_R1.62@64.236,11.596 64.986,11.596 65.286,11.896 RA7_R1.3@66.386,11.896
NetRA7_R1_4: RA7_R1.4 U1_R1.60 | length 2.2
  Bottom Layer w0.34: U1_R1.60@64.236,12.896 65.286,12.896 65.486,12.696 RA7_R1.4@66.386,12.696
NetRA8_R0_1: RA8_R0.1 U1_R0.59 | length 2.3
  Bottom Layer w0.34: U1_R0.59@64.261,36.646 65.061,36.646 65.536,37.121 RA8_R0.1@66.411,37.121
NetRA8_R0_2: RA8_R0.2 U1_R0.57 | length 2.2
  Bottom Layer w0.34: U1_R0.57@64.261,37.946 U1_R0.57@64.286,37.921 RA8_R0.2@66.411,37.921
NetRA8_R0_3: RA8_R0.3 U1_R0.56 | length 2.2
  Bottom Layer w0.34: U1_R0.56@64.261,38.596 66.286,38.596 RA8_R0.3@66.411,38.721
NetRA8_R0_4: RA8_R0.4 U1_R0.54 | length 2.3
  Bottom Layer w0.34: U1_R0.54@64.261,39.896 65.336,39.896 65.711,39.521 RA8_R0.4@66.411,39.521
NetRA8_R1_1: RA8_R1.1 U1_R1.59 | length 2.3
  Bottom Layer w0.34: U1_R1.59@64.236,13.546 65.136,13.546 65.486,13.896 RA8_R1.1@66.411,13.896
NetRA8_R1_2: RA8_R1.2 U1_R1.57 | length 2.2
  Bottom Layer w0.34: U1_R1.57@64.236,14.846 65.161,14.846 65.311,14.696 RA8_R1.2@66.411,14.696
NetRA8_R1_3: RA8_R1.3 U1_R1.56 | length 2.2
  Bottom Layer w0.34: U1_R1.56@64.236,15.496 64.961,15.496 RA8_R1.3@66.411,15.496
NetRA8_R1_4: RA8_R1.4 U1_R1.54 | length 2.4
  Bottom Layer w0.34: U1_R1.54@64.236,16.796 65.011,16.796 65.511,16.296 RA8_R1.4@66.411,16.296
NetRA9_R0_1: RA9_R0.1 U1_R0.51 | length 2.8
  Bottom Layer w0.34: U1_R0.51@64.261,41.846 65.161,41.846 65.411,42.096 65.411,42.471 65.931,42.991 RA9_R0.1@66.409,42.991
NetRA9_R0_2: RA9_R0.2 U1_R0.47 | length 2.4
  Bottom Layer w0.34: U1_R0.47@64.261,44.446 64.911,44.446 65.566,43.791 RA9_R0.2@66.409,43.791
NetRA9_R0_3: RA9_R0.3 U1_R0.46 | length 2.4
  Bottom Layer w0.34: U1_R0.46@64.261,45.096 65.061,45.096 65.566,44.591 RA9_R0.3@66.409,44.591
NetRA9_R0_4: RA9_R0.4 U1_R0.45 | length 2.3
  Bottom Layer w0.34: U1_R0.45@64.261,45.746 65.161,45.746 65.516,45.391 RA9_R0.4@66.409,45.391
NetRA9_R1_1: RA9_R1.1 U1_R1.51 | length 2.8
  Bottom Layer w0.34: U1_R1.51@64.236,18.746 65.311,18.746 66.011,19.446 RA9_R1.1@66.786,19.446
NetRA9_R1_2: RA9_R1.2 U1_R1.47 | length 3
  Bottom Layer w0.34: U1_R1.47@64.236,21.346 64.861,21.346 65.961,20.246 RA9_R1.2@66.786,20.246
NetRA9_R1_3: RA9_R1.3 U1_R1.46 | length 2.9
  Bottom Layer w0.34: U1_R1.46@64.236,21.996 65.011,21.996 65.961,21.046 RA9_R1.3@66.786,21.046
NetRA9_R1_4: RA9_R1.4 U1_R1.45 | length 2.9
  Bottom Layer w0.34: U1_R1.45@64.236,22.646 65.186,22.646 65.986,21.846 RA9_R1.4@66.786,21.846
NetRA10_R0_5: RA10_R0.5 U1_R0.5 | length 1.8
  Bottom Layer w0.34: RA10_R0.5@51.411,34.846 52.186,34.846 52.336,34.696 U1_R0.5@53.161,34.696
NetRA10_R0_6: RA10_R0.6 U1_R0.4 | length 1.8
  Bottom Layer w0.34: RA10_R0.6@51.411,34.046 U1_R0.4@53.161,34.046
NetRA10_R0_7: RA10_R0.7 U1_R0.2 | length 2
  Bottom Layer w0.34: RA10_R0.7@51.411,33.246 52.011,33.246 52.511,32.746 U1_R0.2@53.161,32.746
NetRA10_R1_5: RA10_R1.5 U1_R1.5 | length 2.2
  Bottom Layer w0.34: RA10_R1.5@51.036,11.921 52.036,11.921 52.361,11.596 U1_R1.5@53.136,11.596
NetRA10_R1_6: RA10_R1.6 U1_R1.4 | length 2.2
  Bottom Layer w0.34: RA10_R1.6@51.036,11.121 51.911,11.121 52.086,10.946 U1_R1.4@53.136,10.946
NetRA10_R1_7: RA10_R1.7 U1_R1.2 | length 2.4
  Bottom Layer w0.34: RA10_R1.7@51.036,10.321 51.861,10.321 52.536,9.646 U1_R1.2@53.136,9.646
NetRA11_R0_5: RA11_R0.5 U1_R0.11 | length 1.7
  Bottom Layer w0.34: RA11_R0.5@51.436,38.546 51.486,38.596 U1_R0.11@53.161,38.596
NetRA11_R0_6: RA11_R0.6 U1_R0.10 | length 1.8
  Bottom Layer w0.34: RA11_R0.6@51.436,37.746 51.886,37.746 52.086,37.946 U1_R0.10@53.161,37.946
NetRA11_R0_7: RA11_R0.7 U1_R0.8 | length 1.8
  Bottom Layer w0.34: RA11_R0.7@51.436,36.946 52.011,36.946 52.311,36.646 U1_R0.8@53.161,36.646
NetRA11_R0_8: RA11_R0.8 U1_R0.7 | length 1.8
  Bottom Layer w0.34: RA11_R0.8@51.436,36.146 51.586,35.996 U1_R0.7@53.161,35.996
NetRA11_R1_5: RA11_R1.5 U1_R1.11 | length 2.2
  Bottom Layer w0.34: RA11_R1.5@50.986,15.571 52.111,15.571 52.186,15.496 U1_R1.11@53.136,15.496
NetRA11_R1_6: RA11_R1.6 U1_R1.10 | length 2.2
  Bottom Layer w0.34: RA11_R1.6@50.986,14.771 51.061,14.846 U1_R1.10@53.136,14.846
NetRA11_R1_7: RA11_R1.7 U1_R1.8 | length 2.3
  Bottom Layer w0.34: RA11_R1.7@50.986,13.971 51.736,13.971 52.161,13.546 U1_R1.8@53.136,13.546
NetRA11_R1_8: RA11_R1.8 U1_R1.7 | length 2.3
  Bottom Layer w0.34: RA11_R1.8@50.986,13.171 51.846,13.171 52.121,12.896 U1_R1.7@53.136,12.896
NetS1_I2C_2: S1_I2C.2 U2_I2C.5 | length 15.5
  Top Layer w0.2: U2_I2C.5@64.812,12.302 64.982,12.473 68.402,12.473 68.85,12.025 68.85,9.25 68.275,8.675 67.275,8.675 66.35,7.75 66.35,6 66.75,5.6 69.475,5.6 69.6,5.475 S1_I2C.2@69.6,5.405
"POWER GOOD": JP1_IO.58 JP2_IO.58 U1.Y26 | length 43.8
  Top Layer w0.1: v1(5.3,28.225) JP2_IO.58@6.85,28.225 ; U1.Y26@20.927,44.449 20.976,44.449 v1(21.425,44)
  MidLayer1 w0.1: v1(5.3,28.225) 4.9,28.625 3.325,28.625 2.95,29 2.95,46.625 3.35,47.025 16.78,47.025 16.78,47.02 19.375,44.425 21,44.425 v1(21.425,44)
  Bottom Layer w0.1: v1(5.3,28.225) JP1_IO.58@6.65,28.225
PROG_B: R4_CNF.1 U1_USB.38 | length 16
  Top Layer w0.1: U1_USB.38@71.9,27.85 v1(71.9,29.3)
  Top Layer w0.2: v1(58.925,29.325) 58.925,28.775 R4_CNF.1@59.05,28.65
  DDR layer 1 w0.1: v1(58.925,29.325) 63.275,29.325 63.825,28.775 69.6,28.775 70.634,29.809 71.391,29.809 v1(71.9,29.3)
PWM0: JP1_IO.61 JP2_IO.61 U1.AA21 | length 55.2
  Top Layer w0.1: JP2_IO.61@2.05,26.625 v1(4.175,26.625) ; U1.AA21@25.927,45.423 26.4,44.95 v1(26.4,44.85)
  MidLayer1 w0.1: v1(4.175,26.625) 2.95,26.625 2.275,27.3 2.275,48.6 3.1,49.425 17.2,49.425 17.85,48.775 17.85,47.855 20.43,45.275 25.975,45.275 v1(26.4,44.85)
  Bottom Layer w0.1: JP1_IO.61@2.25,26.625 v1(4.175,26.625)
PWM1: JP1_IO.63 JP2_IO.63 U1.AB24 | length 54.7
  Top Layer w0.1: JP2_IO.63@2.05,25.825 v1(3.6,25.825) ; U1.AB24@22.927,46.449 v1(23.45,45.925)
  MidLayer1 w0.1: v1(3.6,25.825) 2.65,25.825 1.825,26.65 1.825,49.725 3.125,51.025 5.75,51.025 6.3,50.475 12.788,50.475 13.387,51.075 15.65,51.075 15.95,50.775 18.355,50.775 18.952,50.178 18.952,48.348 20.975,46.325 23.05,46.325 v1(23.45,45.925)
  Bottom Layer w0.1: JP1_IO.63@2.25,25.825 v1(3.6,25.825)
PWM2: JP1_IO.65 JP2_IO.65 U1.AC26 | length 56.1
  Top Layer w0.1: JP2_IO.65@2.05,25.025 v1(4.175,25.025) ; U1.AC26@20.927,47.473 v1(21.425,46.975)
  MidLayer1 w0.1: v1(4.175,25.025) 2.1,25.025 1.375,25.75 1.375,49.925 3,51.55 15.811,51.55 16.136,51.225 18.555,51.225 18.88,50.9 20,50.9 20.3,50.6 20.3,48.1 v1(21.425,46.975)
  Bottom Layer w0.1: JP1_IO.65@2.25,25.025 v1(4.175,25.025)
PWM3: JP1_IO.67 JP2_IO.67 U1.W24 | length 41.1
  Top Layer w0.1: JP2_IO.67@2.05,24.225 v1(3.6,24.225) ; U1.W24@22.927,43.449 22.976,43.449 v1(23.45,42.975)
  MidLayer2 w0.1: v1(3.6,24.225) 4,24.625 5.475,24.625 5.7,24.85 5.7,41.15 6.775,42.225 15.5,42.225 16.65,43.375 23.05,43.375 v1(23.45,42.975)
  Bottom Layer w0.1: JP1_IO.67@2.25,24.225 v1(3.6,24.225)
PWM4: JP1_IO.69 JP2_IO.69 U1.W25 | length 40.5
  Top Layer w0.1: JP2_IO.69@2.05,23.425 v1(4.175,23.425) ; U1.W25@21.928,43.448 v1(22.4,42.975)
  MidLayer2 w0.1: v1(4.175,23.425) 4.575,23.825 5.35,23.825 5.925,24.4 5.925,40.5 6.85,41.425 15.525,41.425 17.075,42.975 v1(22.4,42.975)
  Bottom Layer w0.1: JP1_IO.69@2.25,23.425 v1(4.175,23.425)
PWM5: JP1_IO.71 JP2_IO.71 U1.W22 | length 42.5
  Top Layer w0.1: JP2_IO.71@2.05,22.625 v1(3.6,22.625) ; U1.W22@24.927,43.449 24.951,43.449 v1@25.425,42.975
  MidLayer2 w0.1: v1(3.6,22.625) 4,23.025 5.65,23.025 6.4,23.775 6.4,38.675 7.55,39.825 15.525,39.825 17.425,41.725 19.9,41.725 20.5,42.325 24.725,42.325 v1(25.375,42.975)
  Bottom Layer w0.1: JP1_IO.71@2.25,22.625 v1(3.6,22.625)
PWM6: JP1_IO.73 JP2_IO.73 U1.W21 | length 44.2
  Top Layer w0.1: JP2_IO.73@2.05,21.825 v1(4.175,21.825) ; U1.W21@25.927,43.449 v1(26.4,42.975)
  MidLayer2 w0.1: v1(4.175,21.825) 4.575,22.225 5.675,22.225 6.85,23.4 6.85,37.175 7.9,38.225 15.5,38.225 18.55,41.275 25.35,41.275 25.9,41.825 25.9,42.475 v1(26.4,42.975)
  Bottom Layer w0.1: JP1_IO.73@2.25,21.825 v1(4.175,21.825)
PWM7: JP1_IO.75 JP2_IO.75 U1.V21 | length 43.5
  Top Layer w0.1: JP2_IO.75@2.05,21.025 v1(3.6,21.025) ; U1.V21@25.927,42.449 25.927,42.373 v1(26.4,41.9)
  MidLayer2 w0.1: v1(3.6,21.025) 4,21.425 5.65,21.425 7.3,23.075 7.3,35.7 8.225,36.625 15.5,36.625 18.725,39.85 21.125,39.85 21.35,39.625 25.55,39.625 25.9,39.975 25.9,41.35 26.4,41.85 v1(26.4,41.9)
  Bottom Layer w0.1: JP1_IO.75@2.25,21.025 v1(3.6,21.025)
PWR_DOWN/INT: U1.AD12 U1_ETH.7 | length 54.2
  Top Layer w0.1: U1.AD12@34.927,48.449 34.927,48.423 v1(35.425,47.925) ; U1_ETH.7@69.6,36.8 69.6,39.225 70.1,39.725 v1(70.525,39.725)
  MidLayer2 w0.1: v1(35.425,47.925) 36.15,48.65 36.15,51.3 36.425,51.575 38.675,51.575 39.425,52.325 45.43,52.325 47.427,50.328 47.797,50.328 48.775,49.35 55.275,49.35 55.75,49.825 65.475,49.825 66.025,50.375 68.425,50.375 68.975,49.825 68.975,44.325 70.95,42.35 70.95,40.15 v1(70.525,39.725)
RD+: JP1_ETH.4 R12_ETH.1 U1_ETH.17 | length 12.1
  Top Layer w0.2: U1_ETH.17@73.525,40.225 v1(74.825,40.225)
  MidLayer2 w0.2: v1(74.825,40.225) 75.575,40.975 75.575,43.725 76.65,44.8 78.425,44.8 JP1_ETH.4@79.45,45.825
  Bottom Layer w0.2: JP1_ETH.4@79.45,45.825 R12_ETH.1@81.725,45.825
RD-: JP1_ETH.5 R9_ETH.1 U1_ETH.16 | length 12.1
  Top Layer w0.2: U1_ETH.16@73.525,39.725 v1(75.35,39.725)
  MidLayer2 w0.2: v1(75.35,39.725) 75.875,39.725 77.15,41 JP1_ETH.5@77.15,43.825
  Bottom Layer w0.2: JP1_ETH.5@77.15,43.825 78.175,42.8 81.525,42.8 R9_ETH.1@81.725,42.6
RDWR_B/WRU: U1.AC5 U1_USB.30 | length 75.5
  Top Layer w0.1: U1.AC5@41.943,47.432 v1(42.416,46.959) ; U1_USB.30@75.9,27.85 v1(75.9,29.3)
  DDR layer 1 w0.1: v1(42.416,46.959) 41.975,47.4 41.975,50.675 42.517,51.217 44.142,51.217 44.483,51.558 44.483,52.233 44.692,52.442 45.958,52.442 47.308,51.092 48.242,51.092 49.192,52.042 52.958,52.042 53.55,51.45 54.9,51.45 55.225,51.775 55.225,52.775 55.75,53.3 60.725,53.3 61.925,52.1 66.45,52.1 67.506,53.156 76.019,53.156 80.65,48.525 80.65,29.75 79.528,28.628 76.572,28.628 v1(75.9,29.3)
RESET: JP1_IO.3 JP2_IO.3 R12_SW.2 S4_SW.2 U1.AE19 U1_USB.39 | length 145.3
  Top Layer w0.1: JP2_IO.3@2.05,49.825 v1(4.175,49.825) ; U1_USB.39@71.4,27.85 v1(71.4,28.625)
  Top Layer w0.2: U1.AE19@27.927,49.449 27.931,49.449 v1@28.475,48.905
  DDR layer 1 w0.1: v1(4.175,49.825) 4.175,50.375 4.875,51.075 12.275,51.075 12.75,51.55 16.061,51.55 16.811,52.3 18.6,52.3 18.875,52.025 19.975,52.025 20.578,52.628 28.472,52.628 28.7,52.4 28.7,51.775 28.875,51.6 28.875,49.3 v1(28.475,48.9)
  DDR layer 2 w0.1: v1(28.475,48.9) 28.075,48.5 28.075,8.875 28.672,8.278 32.247,8.278 34.525,6 S4_SW.2@39.473,6
  Bottom Layer w0.1: JP1_IO.3@2.25,49.825 v1(4.175,49.825)
  Bottom Layer w0.2: S4_SW.2@39.473,6 39.473,8.323 40.175,9.025 50.85,9.025 51.55,8.325 69.1,8.325 71.95,11.175 71.95,17.225 70.95,18.225 70.95,20.6 71.4,21.05 v1(71.4,28.625)
  Bottom Layer w0.4: S4_SW.2@39.473,6 40.498,4.975 R12_SW.2@41.3,4.975
RX_CLK: U1.AE7 U1_ETH.38 | length 35.4
  Top Layer w0.1: U1.AE7@39.927,49.449 39.976,49.449 v1(40.425,49) ; U1_ETH.38@65.175,43.225 v3(66.4,43.225)
  MidLayer1 w0.1: v1(40.425,49) 39.975,49.45 39.975,50.4 40.3,50.725 45.605,50.725 45.977,50.353 46.697,50.353 47.175,49.875 47.725,49.875 48.943,48.657 64.793,48.657 66.4,47.05 v3(66.4,43.225)
RX_DV: U1.AD5 U1_ETH.39 | length 28.1
  Top Layer w0.1: U1.AD5@41.927,48.449 41.927,48.373 v1(42.4,47.9) ; v3@63.85,42.725 U1_ETH.39@65.175,42.725
  MidLayer1 w0.1: v1(42.4,47.9) 42.975,47.325 42.975,46.725 43.2,46.5 43.65,46.5 43.875,46.275 43.875,45.8 44.1,45.575 45.55,45.575 45.803,45.828 48.122,45.828 49.047,44.903 54.853,44.903 55.325,45.375 63.25,45.375 63.925,44.7 v3(63.925,42.725)
RX_ER: U1.AD4 U1_ETH.41 | length 29.6
  Top Layer w0.1: U1.AD4@42.927,48.449 42.951,48.449 v1(43.5,47.9) ; v3(63.925,41.725) U1_ETH.41@65.175,41.725
  MidLayer1 w0.1: v1(43.5,47.9) 43.5,47.625 43.95,47.175 43.95,46.7 44.15,46.5 44.55,46.5 44.997,46.053 48.222,46.053 49.147,45.128 54.228,45.128 55.35,46.25 63.9,46.25 64.55,45.6 64.55,42.35 v3(63.925,41.725)
RXD_0: U1.AD6 U1_ETH.43 | length 33.2
  Top Layer w0.1: U1.AD6@40.927,48.448 v1(41.475,47.9) ; v3(63.925,40.725) U1_ETH.43@65.175,40.725
  MidLayer1 w0.1: v1(41.475,47.9) 42,48.425 43.675,48.425 44,48.1 44,47.7 44.25,47.45 44.65,47.45 44.95,47.15 44.95,46.675 45.325,46.3 48.675,46.3 49.025,45.95 53.65,45.95 53.725,45.875 54.6,45.875 55.225,46.5 64.125,46.5 64.825,45.8 64.825,41.625 v3(63.925,40.725)
RXD_1: U1.AF8 U1_ETH.44 | length 40.8
  Top Layer w0.1: U1.AF8@38.927,50.449 39.001,50.449 v1(39.4,50.05) ; U1_ETH.44@65.175,40.225 v3(66.4,40.225)
  MidLayer1 w0.1: v1(39.4,50.05) 39.025,50.425 39.025,51.175 39.35,51.5 40.18,51.5 40.705,50.975 45.68,50.975 46.052,50.603 46.847,50.603 47.325,50.125 47.925,50.125 49.15,48.9 65.225,48.9 66.852,47.273 66.852,42.798 67.562,42.088 67.562,41.386 v3(66.4,40.225)
  DDR layer 1 w0.1: v1(39.4,50.05) v1@39.525,50.05
RXD_2: U1.AE4 U1_ETH.45 | length 32.3
  Top Layer w0.1: U1.AE4@42.927,49.449 43.051,49.449 v1(43.5,49) ; v3(63.925,39.725) U1_ETH.45@65.175,39.725
  MidLayer1 w0.1: v1(43.5,49) 44.05,48.45 44.75,48.45 44.95,48.25 44.95,47.7 45.225,47.425 48.6,47.425 49.262,46.763 49.937,46.763 50.375,46.325 53.5,46.325 53.925,46.75 64.35,46.75 65.15,45.95 65.15,40.95 v3(63.925,39.725)
RXD_3: U1.AE8 U1_ETH.46 | length 44.9
  Top Layer w0.1: U1.AE8@38.927,49.449 38.951,49.449 v1(39.4,49) ; U1_ETH.46@65.175,39.225 v3(66.4,39.225)
  MidLayer1 w0.1: v1(39.4,49) 38.75,49.65 38.75,51.575 38.975,51.8 40.425,51.8 40.95,52.325 45.55,52.325 47.475,50.4 48.125,50.4 49.2,49.325 49.7,49.325 50.102,49.728 65.022,49.728 67.1,47.65 67.1,42.875 67.787,42.188 67.787,40.613 v3(66.4,39.225)
SCL: R2_USB.1 U1_I2C.6 U1_USB.15 U2_I2C.6 | length 41.1
  Top Layer w0.2: U2_I2C.6@64.812,13.572 66.372,13.572 66.566,13.378 68.777,13.378 69.327,12.827 69.327,9.052 68.473,8.198 67.473,8.198 66.975,7.7 v1(66.975,6.35) ; U1_USB.15@77.05,20.7 v1(77.05,20.05) 77.475,19.625 R2_USB.1@78.35,19.625
  MidLayer1 w0.2: v1@66.975,6.325 70.575,6.325 72.15,7.9 72.15,19.2 73,20.05 v1(77.05,20.05)
  Bottom Layer w0.2: U1_I2C.6@63.55,5.6 66.225,5.6 v1(66.975,6.35)
SCL_EXT: JP1_IO.83 JP2_IO.83 R2_IO.1 U1.U21 | length 57.7
  Top Layer w0.1: JP2_IO.83@2.05,17.825 v1(3.6,17.825) ; U1.U21@25.927,41.449 25.927,41.348 v1(26.4,40.875)
  DDR layer 1 w0.1: v1(3.6,17.825) 4,18.225 5.7,18.225 7.102,19.627 7.102,35.127 7.8,35.825 15.475,35.825 18.3,38.65 18.3,39.975 19.2,40.875 21.772,40.875 22.172,41.275 26.025,41.275 v1(26.4,40.875)
  DDR layer 2 w0.1: v1(3.6,17.825) 4,18.225 6.275,18.225 7.175,19.125 7.175,22.025 7.9,22.75 v1(10.2,22.75)
  Bottom Layer w0.1: JP1_IO.83@2.25,17.825 v1(3.6,17.825) ; R2_IO.1@9.225,22.45 9.525,22.75 v1(10.2,22.75)
SCLK: U1.AA10 U1_SPI.6 U1_USB.33 | length 65
  Top Layer w0.1: U1.AA10@36.927,45.423 v1(37.425,44.925) ; U1_SPI.6@65.65,24.19 64.985,24.19 64.6,24.575 64.6,27.65 66.55,29.6 70.2,29.6 70.525,29.925 73.9,29.925 74.4,29.425 v1(74.4,28.625) U1_USB.33@74.4,27.85
  MidLayer1 w0.1: v1(37.425,44.925) 37.85,45.35 39.425,45.35 41.375,43.4 45.6,43.4 45.9,43.1 45.9,42.675 46.125,42.45 48.425,42.45 48.725,42.75 49.805,42.75 50.855,41.7 56.975,41.7 57.525,41.15 57.525,38.825 58.65,37.7 60.175,37.7 61.8,36.075 63.8,36.075 67.225,32.65 73.1,32.65 74.4,31.35 v1(74.4,28.625)
SDA: R3_USB.1 S1_I2C.3 U1_I2C.7 U1_USB.16 | length 39.7
  Top Layer w0.2: v1(75.7,5.15) 75.975,5.425 S1_I2C.3@77.25,5.425 ; U1_USB.16@77.05,21.2 77.575,21.2 v1(77.825,20.95) 81.225,20.95 81.5,20.675 R3_USB.1@81.5,19.625
  MidLayer1 w0.2: v1(64.85,6.25) 64.225,5.625 64.225,4.475 64.85,3.85 68.45,3.85 69,4.4 74.95,4.4 76.452,5.902 76.452,18.152 77.825,19.525 v1(77.825,20.95)
  Bottom Layer w0.2: U1_I2C.7@63.525,6.25 v1(64.85,6.25)
SDA_EXT: JP1_IO.81 JP2_IO.81 R1_IO.1 U1.Y17 | length 63.4
  Top Layer w0.1: JP2_IO.81@2.05,18.625 v1(4.175,18.625) ; U1.Y17@29.927,44.449 29.927,44.423 v1(30.35,44)
  DDR layer 1 w0.1: v1(4.175,18.625) 4.575,19.025 5.7,19.025 6.65,19.975 6.65,36.925 7.15,37.425 15.5,37.425 17.85,39.775 17.85,40.175 19.022,41.347 20.247,41.347 21.25,42.35 29.6,42.35 29.925,42.675 29.925,43.575 v1(30.35,44)
  DDR layer 2 w0.1: v1(4.175,18.625) 4.575,19.025 5.925,19.025 6.825,19.925 6.825,23.35 7.525,24.05 v1(10.2,24.05)
  Bottom Layer w0.1: JP1_IO.81@2.25,18.625 v1(4.175,18.625) ; R1_IO.1@9.225,24.35 9.525,24.05 v1(10.2,24.05)
"SERIAL IN": JP2_JTAG.3 U1.AC7 | length 46.7
  Top Layer w0.1: U1.AC7@39.927,47.449 v1(40.425,46.95)
  MidLayer1 w0.1: v1(40.425,46.95) 40.425,46.65 42.625,44.45 46.525,44.45 46.825,44.15 48.6,44.15 48.95,43.8 58.525,43.8 58.975,43.35 58.975,39.65 62.025,36.6 64.4,36.6 67.175,33.825 73.5,33.825 JP2_JTAG.3@77.15,37.475
"SERIAL OUT": JP2_JTAG.2 U1.AC6 | length 48.5
  Top Layer w0.1: U1.AC6@40.927,47.449 40.976,47.449 v1(41.475,46.95)
  MidLayer1 w0.1: v1(41.475,46.95) 41.475,46.15 42.275,45.35 45.9,45.35 46.225,45.025 48.075,45.025 49.072,44.028 58.697,44.028 59.25,43.475 59.25,39.775 62.175,36.85 64.625,36.85 66.825,34.65 68.675,34.65 71.675,37.65 75.4,37.65 76.2,38.45 78.425,38.45 JP2_JTAG.2@79.45,39.475
SPI_CS_F: U1.Y8 U1_SPI.1 U1_USB.36 | length 53.7
  Top Layer w0.1: U1.Y8@38.927,44.449 v1@39.4,43.976 ; U1_SPI.1@57.85,26.73 57.85,27.5 58.375,28.025 59.525,28.025 61.625,30.125 61.625,33.575 v1(61.9,33.85) ; U1_USB.36@72.9,27.85 v1(72.9,29.3)
  MidLayer1 w0.1: v1(39.4,43.95) 40.025,43.325 40.025,41.7 40.375,41.35 40.9,41.35 41.05,41.2 41.05,40.7 41.3,40.45 46.9,40.45 47.65,39.7 53.475,39.7 53.925,39.25 55.925,39.25 58.9,36.275 58.9,35.4 60.45,33.85 64.7,33.85 67.45,31.1 72.4,31.1 72.9,30.6 v1(72.9,29.3)
SWITCH0: R13_SW.1 S5_SW.1 U1.D7 | length 41.7
  Top Layer w0.1: U1.D7@39.927,28.449 40.026,28.449 v1@40.5,27.975
  Top Layer w0.4: v1(60.125,2.175) S5_SW.1@60.131,1.069
  MidLayer1 w0.1: v1(40.525,27.95) 40.125,27.55 40.125,26.78 40.43,26.475 40.907,26.475 42.5,24.882 42.5,23.35 43.1,22.75 43.932,22.75 44.075,22.607 44.075,21.45 45.425,20.1 45.425,19.15 46.05,18.525 46.6,18.525 49.075,16.05 50,16.05 51.025,15.025 51.025,10.05 53.472,7.603 58.8,7.603 60.125,6.277 v1(60.125,2.175)
  Bottom Layer w0.2: R13_SW.1@59.3,2.175 v1(60.125,2.175)
SWITCH1: R14_SW.1 S5_SW.2 U1.F7 | length 52.6
  Top Layer w0.1: U1.F7@39.927,30.449 40.426,29.95 v1@40.55,29.95
  Top Layer w0.4: S5_SW.2@62.696,1.069 v1(62.696,2.179)
  MidLayer1 w0.1: v1@40.55,29.95 40.925,29.525 40.925,26.775 42.725,24.975 42.725,23.5 43.2,23.025 43.975,23.025 44.3,22.7 44.3,21.55 45.65,20.2 45.65,19.25 46.15,18.75 46.825,18.75 49.3,16.275 50.325,16.275 51.325,15.275 51.325,10.225 53.722,7.828 58.999,7.828 60.475,6.351 60.475,3.4 61.696,2.179 v1(62.696,2.179)
  Bottom Layer w0.2: R14_SW.1@59.3,6.65 59.75,6.65 60.65,5.75 60.65,1.625 60.975,1.3 62.2,1.3 62.571,1.671 v1(62.696,2.179)
  other v1: 40.525,29.95
SWITCH2: R15_SW.1 S5_SW.3 U1.C6 | length 47.4
  Top Layer w0.1: U1.C6@40.927,27.449 40.927,27.373 v1@41.35,26.95
  Top Layer w0.4: S5_SW.3@65.211,1.069 v1(65.211,2.176)
  MidLayer1 w0.1: v1@41.35,26.95 41.35,26.675 42.95,25.075 42.95,24.1 43.15,23.9 43.882,23.9 44.525,23.257 44.525,21.65 45.875,20.3 45.875,19.35 46.25,18.975 47,18.975 48.825,17.15 50.55,17.15 51.625,16.075 51.625,10.35 53.775,8.2 59.051,8.2 60.438,6.813 60.775,6.476 60.775,3.55 61.6,2.725 64.662,2.725 v1(65.211,2.176)
  Bottom Layer w0.2: R15_SW.1@61.425,2.2 61.9,2.675 63.125,2.675 63.624,2.176 v1(65.211,2.176)
  other v1: 41.375,26.925
SWITCH3: R16_SW.1 S5_SW.4 U1.D6 | length 56.1
  Top Layer w0.1: U1.D6@40.927,28.449 40.927,28.398 v1(41.375,27.95)
  Top Layer w0.4: S5_SW.4@67.775,1.05 v1(67.775,2.175)
  MidLayer1 w0.1: v1(41.375,27.95) 41.775,27.55 41.775,26.637 43.175,25.237 43.175,24.25 43.275,24.15 43.95,24.15 44.75,23.35 44.75,21.75 46.1,20.4 46.1,19.45 46.35,19.2 47.2,19.2 48.425,17.975 50.5,17.975 51.925,16.55 51.925,10.5 53.975,8.45 59.225,8.45 61.925,5.75 61.925,3.725 62.625,3.025 66.925,3.025 v1(67.775,2.175)
  Bottom Layer w0.2: R16_SW.1@61.4,6.65 61.85,6.65 62.075,6.425 62.075,3.625 62.425,3.275 65.05,3.275 66.15,2.175 v1(67.775,2.175)
TCK: R1_JTAG.1 U1.B24 | length 101.3
  Top Layer w0.1: U1.B24@22.927,26.449 22.951,26.449 v1@23.425,25.975
  DDR layer 2 w0.1: v1@23.425,25.975 24.075,25.325 24.075,11.593 28.293,7.375 31.843,7.375 35.443,3.775 70.3,3.775 73.05,6.525 73.05,16.25 75.125,18.325 79.925,18.325 81.5,19.9 81.5,22.125 80.9,22.725 80.9,31.175 v1(81.325,31.6)
  Bottom Layer w0.3: R1_JTAG.1@80.5,31.6 v1(81.325,31.6)
  other v1: 23.45,25.975
TD+: JP1_ETH.2 R14_ETH.1 U1_ETH.14 | length 17.3
  Top Layer w0.2: v1(71.9,38.725) U1_ETH.14@73.525,38.725
  MidLayer2 w0.2: v1(71.9,38.725) 71.9,40.75 74.65,43.5 74.65,44.85 76.6,46.8 78.425,46.8 JP1_ETH.2@79.45,47.825
  Bottom Layer w0.2: JP1_ETH.2@79.45,47.825 81.425,47.825 R14_ETH.1@81.725,47.525
TD-: JP1_ETH.3 R13_ETH.1 U1_ETH.13 | length 16.5
  Top Layer w0.2: v1(72.375,38.225) U1_ETH.13@73.525,38.225
  MidLayer2 w0.2: v1(72.375,38.225) 72.9,38.75 72.9,41 75.1,43.2 75.1,44.675 76.25,45.825 JP1_ETH.3@77.15,45.825
  Bottom Layer w0.1: JP1_ETH.3@77.15,45.8 JP1_ETH.3@77.15,45.825
  Bottom Layer w0.2: JP1_ETH.3@77.15,45.8 78.15,44.8 80.35,44.8 80.828,44.322 81.722,44.322 R13_ETH.1@81.725,44.325
TDI: R3_JTAG.1 U1.C1 | length 38.1
  Top Layer w0.1: U1.C1@45.927,27.449 v1@46.375,27.001
  MidLayer1 w0.1: v1(46.55,27) 47.5,27 47.675,26.825 47.675,26.25 47.975,25.95 58.25,25.95 v1(58.75,25.45)
  DDR layer 1 w0.1: v1(58.75,25.45) 59.15,25.05 69.875,25.05 70.575,25.75 76.525,25.75 76.975,26.2 80.925,26.2 v1(81.325,25.8)
  Bottom Layer w0.3: R3_JTAG.1@80.475,25.9 80.575,25.8 v1(81.325,25.8)
TDO: JP1_JTAG.3 U1.D24 | length 97.1
  Top Layer w0.1: U1.D24@22.927,28.448 v1@23.425,27.95
  DDR layer 2 w0.1: v1@23.425,27.95 23.9,27.475 23.9,25.818 24.3,25.418 24.3,11.686 28.386,7.6 31.936,7.6 35.536,4 69.95,4 72.825,6.875 72.825,16.347 75.028,18.55 79.825,18.55 80.497,19.222 80.497,25.658 JP1_JTAG.3@79,27.155
  other v1: 23.45,27.95
TMS: R2_JTAG.1 U1.A24 | length 92.3
  Top Layer w0.1: U1.A24@22.927,25.449 23.351,25.025 v1@23.425,24.95
  DDR layer 2 w0.1: v1(23.45,24.95) 23.85,24.55 23.85,11.5 28.2,7.15 31.75,7.15 35.35,3.55 70.586,3.55 73.275,6.239 73.275,16.15 75.225,18.1 80.025,18.1 81.75,19.825 81.75,22.65 v1(81.325,23.075)
  Bottom Layer w0.34: R2_JTAG.1@80.475,23.075 v1(81.325,23.075)
TX_CLK: U1.AB9 U1_ETH.1 | length 52.8
  Top Layer w0.1: U1.AB9@37.927,46.552 37.927,46.398 v1(38.35,45.975) ; v3(65.975,36.8) U1_ETH.1@66.6,36.8
  MidLayer1 w0.1: v1(38.35,45.975) 37.925,46.4 37.925,51.15 39.35,52.575 45.675,52.575 47.6,50.65 49.275,50.65 49.95,49.975 67.15,49.975 68.025,49.1 68.025,37.45 67.375,36.8 v3(65.975,36.8)
TX_EN: U1.AB10 U1_ETH.2 | length 57.2
  Top Layer w0.1: U1.AB10@36.927,46.449 37.026,46.449 v1(37.475,46) ; v3(66.6,35.6) 66.9,35.6 67.1,35.8 U1_ETH.2@67.1,36.8
  MidLayer1 w0.1: v1(37.475,46) 37.025,46.45 37.025,52.425 37.425,52.825 45.825,52.825 47.475,51.175 49.225,51.175 50.05,50.35 54.775,50.35 55.303,50.878 66.797,50.878 68.9,48.775 68.9,37.9 v3(66.6,35.6)
TXD_0: U1.AB11 U1_ETH.3 | length 58.1
  Top Layer w0.1: U1.AB11@35.927,46.449 36.375,46.001 v1(36.375,45.95) ; U1_ETH.3@67.6,36.8 67.6,35.8 67.8,35.6 v3(68.1,35.6)
  MidLayer1 w0.1: v1(36.375,45.95) 35.925,46.4 35.925,52.525 36.45,53.05 45.925,53.05 47.575,51.4 66.875,51.4 69.15,49.125 69.15,36.65 v3(68.1,35.6)